# Altium PCB AWSAM5_CS704.PcbDoc
Units mm, origin at the board's own origin, x right, y up, seen from the top; angles counter-clockwise.
Board outline 46 x 71 mm, 2 copper layers (Top Layer, Bottom Layer); 51 components, 51 nets, 234 pads, 129 vias.
Unrouted connection lines stored in the file: 3.
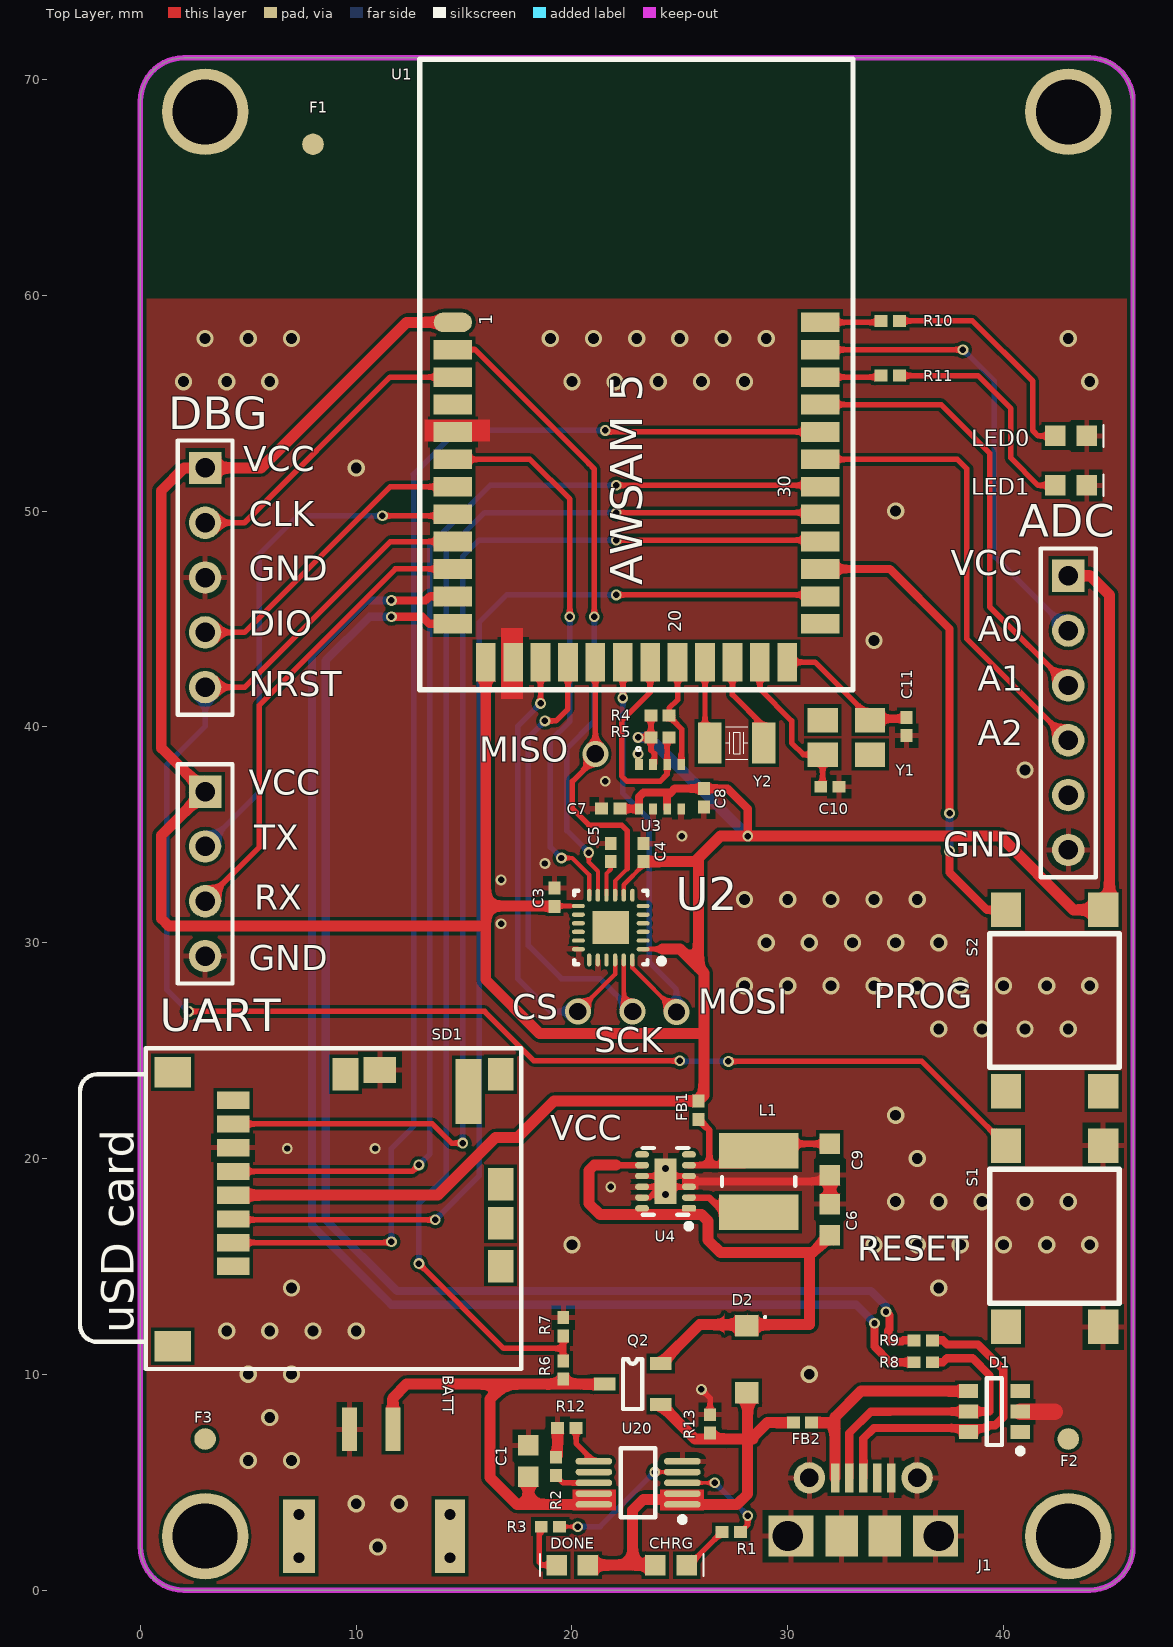
[diagram p0: Top Layer view]
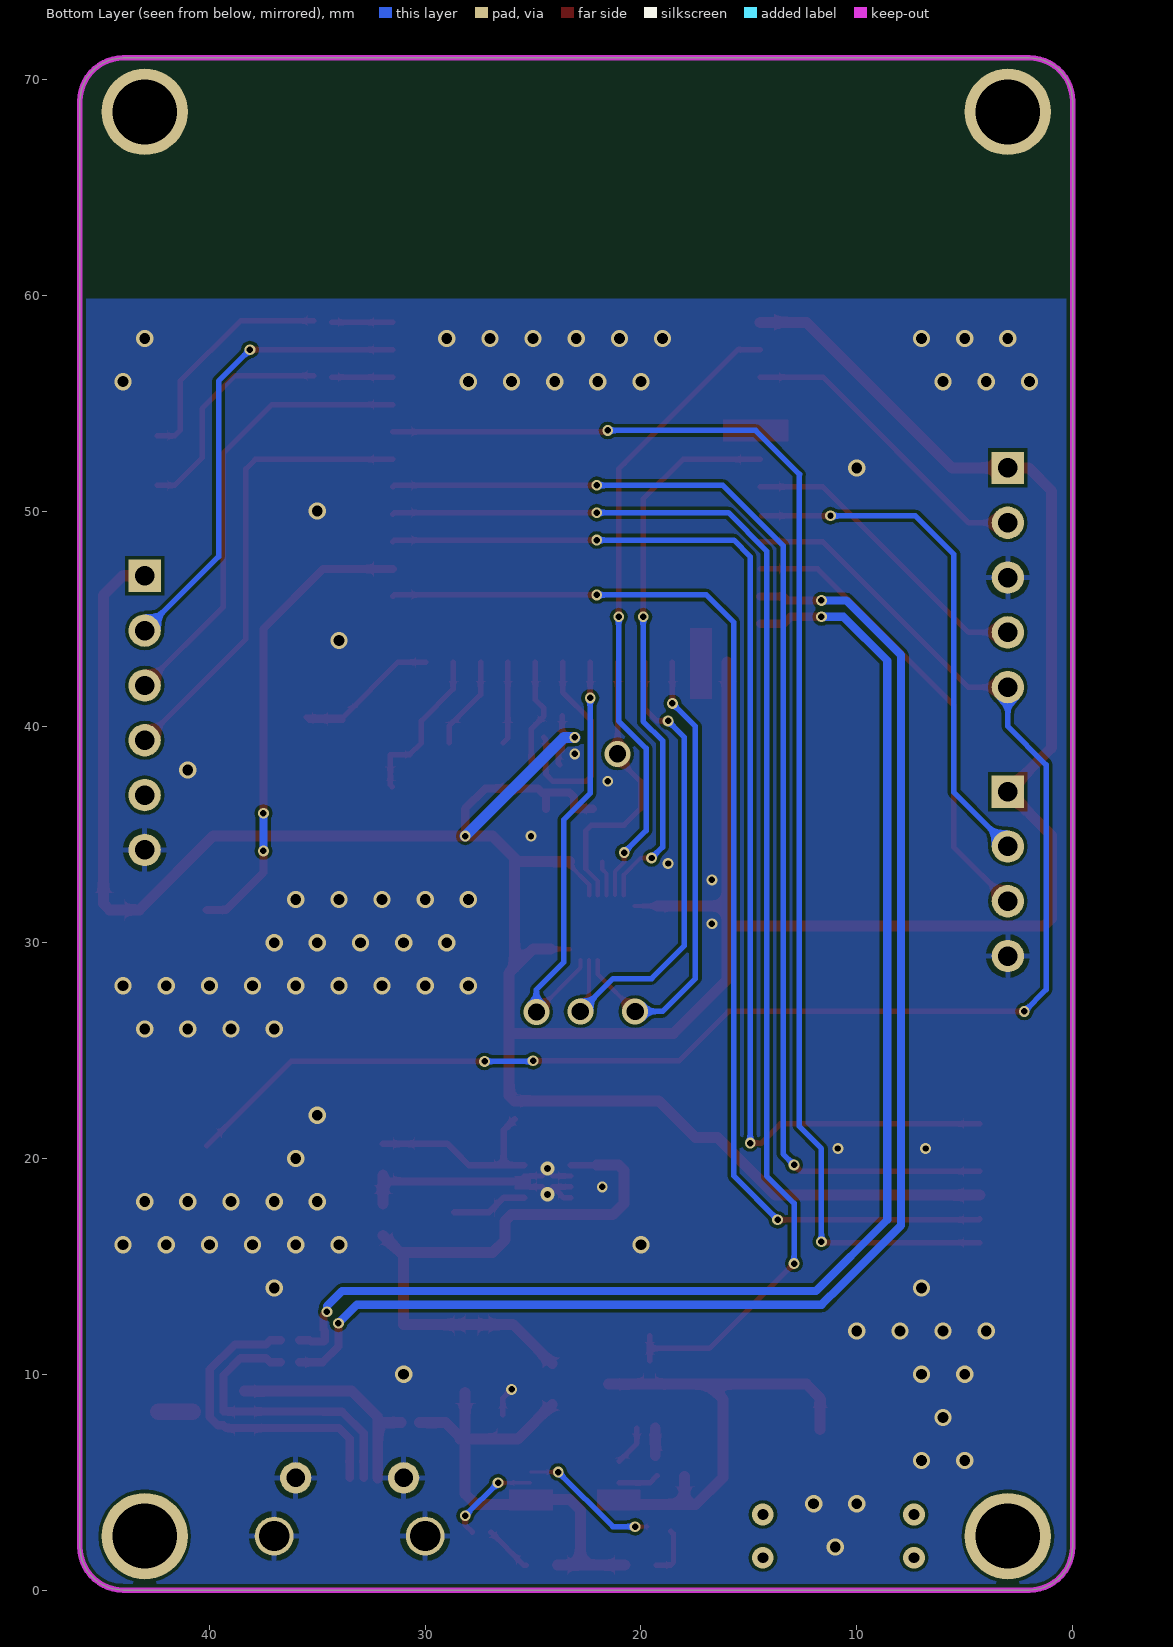
[diagram p1: Bottom Layer view, seen from below]

## Layer stack, top to bottom
Top Solder: solder mask 0.0102, Solder Resist, Dk 3.5
Top Layer: signal copper 0.0356
Dielectric 1: dielectric 0.32, FR-4, Dk 4.8
Bottom Layer: signal copper 0.0356
Bottom Solder: solder mask 0.0102, Solder Resist, Dk 3.5

## Board outline
0,2 0,69 cw(c2,69) 2,71 44,71 cw(c44,69) 46,69 46,2 cw(c44,2) 44,0 2,0 cw(c2,2)

## Design rules (kind name [scope] priority, off if disabled: settings)
Clearance [All] p1: gap=0.152
DiffPairsRouting [All] p1: maxlimit=0.254 minlimit=0.254 mostfreqgap=0.254 toplayer_minwidth=0.381 toplayer_maxwidth=0.381 toplayer_prefwidth=0.381 bottomlayer_minwidth=0.381 bottomlayer_maxwidth=0.381 bottomlayer_prefwidth=0.381 maxuncoupledlength=12.7
HoleSize [All] p1: absolutevalues=TRUE maxlimit=4 minlimit=0.025 maxpercent=80.000 minpercent=20.000
PolygonConnect PolygonConnect_GND [InNet('GND') vs IsVia] p1: connectstyle=Direct reliefconductorwidth=0.254 reliefentries=4 polygonreliefangle="90 Angle" airgapwidth=0.254
PolygonConnect [All] p2: connectstyle=Relief reliefconductorwidth=0.254 reliefentries=4 polygonreliefangle="90 Angle" airgapwidth=0.254
RoutingVias [All] p1: holewidth=0.3 width=0.5 viastyle="Through Hole" minholewidth=0.3 minwidth=0.5 maxholewidth=0.3 maxwidth=0.5
SilkToSolderMaskClearance [IsPad] p1: minsilkscreentomaskgap=0.152 clearancetoexposedcopper=TRUE
SolderMaskExpansion [All] p1: expansion=0.102
Width [All] p1: maxlimit=0.762 minlimit=0.152 preferedwidth=0.254
27 further rules are at their usual default settings.

## Classes and differential pairs
differential pair USB_D: +USB_D_P -USB_D_N
differential pair USB: +USB_P -USB_N

## Components (designator, comment, footprint, x,y, rotation, side; value= is the part's Value field where it differs from the comment)
ADC "Header 6" HDR1X6 43,47 r270 top
BATT "JST-PH-2" JST-PH-2POS 10.7,6.4 r180 top
C1 "CAP" CAP0603 17.986,5.984 r270 top
C3 "CAP" CAP0402 19.2,32.1 r270 top
C4 "CAP" CAP0402 23.32,34.178 r270 top
C5 "CAP" CAP0402 21.796,34.178 r270 top
C6 "CAP" CAP0603 31.956,17.16 r270 top
C7 "CAP" CAP0402 21.796,36.21 r0 top
C8 "CAP" CAP0402 26.114,36.718 r90 top
C9 "CAP" CAP0603 31.956,19.954 r90 top
C10 "CAP" CAP0402 31.956,37.226 r180 top
C11 "CAP" CAP0402 35.512,40.02 r90 top
CHRG "LED" LED0603P 24.59,1.158 r0 top
D1 "SP0505BAHTG" SOT26A-6L 39.576,8.27 r180 top
D2 "DIODE-SCHOTTKY" SODFL350X110-2N 28.1,10.7 r270 top
DBG "" HDR1X5 3,52 r270 top locked
DONE "LED" LED0603P 20.018,1.158 r180 top
F1 "FIDUCIAL" FIDUCIAL-1MM#1 2.5,54 r0 top locked
F2 "FIDUCIAL" FIDUCIAL-1MM#2 38,7 r0 top
F3 "FIDUCIAL" FIDUCIAL-1MM#3 3,7 r0 top
FB1 "IND" IND0402 25.86,22.24 r90 top
FB2 "IND" IND0402 30.686,7.762 r180 top
J1 "1050170001" 1050170001 33.5,2.5 r0 top locked
L1 "LPS3314" "CoilCraft- LPS3314" 28.654,18.938 r90 top
LED0 "LED" LED0603P 43.132,53.482 r0 top
LED1 "LED" LED0603P 43.132,51.196 r0 top
Q2 "FET-PCH-DIODE" SOT23-3 22.812,9.54 r270 top
R1 "Resistor" SMT0402 27.384,2.682 r180 top
R2 "RES" SMT0402 19.256,5.73 r90 top
R3 "Resistor" SMT0402 19.002,2.936 r180 top
R4 "RES" SMT0402 24.082,40.528 r180 top
R5 "RES" SMT0402 24.082,39.512 r180 top
R6 "RES" SMT0402 19.6,10.2 r270 top
R7 "RES" SMT0402 19.6,12.2 r270 top
R8 "15R" SMT0402 36.274,10.556 r0 top
R9 "Resistor" SMT0402 36.274,11.572 r0 top
R10 "Resistor" SMT0402 34.75,58.816 r180 top
R11 "Resistor" SMT0402 34.75,56.276 r180 top
R12 "RES" SMT0402 19.764,7.508 r180 top
R13 "RES" RES0402 26.4,7.7 r270 top
S1 "SW-PB-RESET" "MC32882 Switch" 42.37,16.398 r270 top
S2 "SW-PB-BOOT0" "MC32882 Switch" 42.37,27.32 r270 top
SD1 "Molex 502570" "micro SD" 0.5,10.5 r90 top locked
U1 "AWSAM_5" AWSAM_5 31.5,43 r90 top locked
U2 "MPU-9250" QFN40P300X300X105_HS-25L 21.8,30.7 r180 top
U3 "BME280" BME280 24.082,37.226 r90 top
U4 "TPS62740" TPS62740_12Pin 24.336,18.938 r180 top
U20 "MCP73833-FCI/UN" MSOP-UN10_N 23.066,4.968 r180 top
UART "Header 4" HDR1X4 3,37 r270 top locked
Y1 "TSX-3225" AP7-00061 32.718,39.512 r90 top
Y2 "CM315-32.768KEZF-UT" "SMD Crystal 32kHz" 27.638,39.258 r0 top

## Footprints (in the part's own frame and the unit in brackets; to place one, negate y for a bottom-side part, rotate by r counter-clockwise, add the part's x,y. Pads: shape width x height; smd on the part's side, far side on the other; paste and mask are expansions set on the pad)
1050170001 [mm] "CONN USB MICRO MOLEX MODIFIED FOR DRILL HITS"
  round 1.8 hole 1.4: 0(-3.5,0) 0(3.5,0)
  rect 2.1x1.9 smd: 0(-3.35,0) 0(3.35,0)
  round 1.45 hole 0.85: 0(-2.5,2.7) 0(2.5,2.7)
  rect 1.5x1.9 smd: 0(-1,0) 0(1,0)
  rect 0.4x1.35 smd: 1(-1.3,2.7) 2(-0.65,2.7) 3(0,2.7) 4(0.65,2.7) 5(1.3,2.7)
  body extent -4.1,-2.5 4.1,2.9, height 2.78
AP7-00061 [mm] "TSX-3225"
  rect 1.15x1.4 smd: 1(-0.8,1.1) 2(-0.8,-1.1) 3(0.8,-1.1) 4(0.8,1.1)
  body extent -1.25,-1.61 1.25,1.61, height 0.82
AWSAM_5 [mil] "Footprint for AWSAM_5"
  oval 36x70 smd: 1(620,670)
  rect 36x70 smd: 2(570,670) 3(520,670) 4(470,670) 5(420,670) 6(370,670) 7(320,670) 8(270,670) 9(220,670) 10(170,670) 11(120,670) 12(70,670) 25(70,0) 26(120,0) 27(170,0) 28(220,0) 29(270,0) 30(320,0) 31(370,0) 32(420,0) 33(470,0) 34(520,0) 35(570,0) 36(620,0)
  rect 70x36 smd: 13(0,610) 14(0,560) 15(0,510) 16(0,460) 17(0,410) 18(0,360) 19(0,310) 20(0,260) 21(0,210) 22(0,160) 23(0,110) 24(0,60)
  silkscreen extent -50,-60 1100,730, body extent 0,0 1100,685, height 170
BME280 [mm] "BOSH SENSORTECH TEMP/PRESS/HUMID SENSOR"
  rect 0.5x0.35 smd: 1(1.025,0.975) 2(1.025,0.325) 3(1.025,-0.325) 4(1.025,-0.975) 5(-1.025,-0.975) 6(-1.025,-0.325) 7(-1.025,0.325) 8(-1.025,0.975)
  silkscreen extent 1.65,0.9 1.85,1.1, body extent -1.25,-1.25 1.25,1.25, height 0.93
CAP0402 [mm] "0402 foorprint SMT"
  rect 0.6x0.55 smd: 1(-0.425,0) 2(0.425,0)
  body extent -0.5,-0.26 0.5,0.26, height 0.57
CAP0603 [mm]
  rect 0.95x0.95 smd: 1(-0.725,0) 2(0.725,0)
  body extent -0.8,-0.41 0.8,0.41, height 0.57
"CoilCraft- LPS3314" [mm]
  rect 1.65x3.7 smd: 1(-1.425,0) 2(1.425,0)
  silkscreen extent -0.2,-1.7 0.2,1.7, body extent -1.7,-1.7 1.7,1.7, height 1.3
FIDUCIAL-1MM#1 [mm] "1MM FIDUCAL MARKER"
  round 1 smd mask+0.5: 1(5.5,13)
FIDUCIAL-1MM#2 [mm] "1MM FIDUCAL MARKER"
  round 1 smd mask+0.5: 1(5,0)
FIDUCIAL-1MM#3 [mm] "1MM FIDUCAL MARKER"
  round 1 smd mask+0.5: 1(0,0)
HDR1X4 [mm] "Connector; Header; 4 Position"
  rect 1.5x1.5 hole 0.9: 1(0,0)
  round 1.5 hole 0.9: 2(2.54,0) 3(5.08,0) 4(7.62,0)
  silkscreen extent -1.27,-1.27 8.89,1.27
HDR1X5 [mm] "Connector; Header; 5 Position"
  rect 1.5x1.5 hole 0.9: 1(0,0)
  round 1.5 hole 0.9: 2(2.54,0) 3(5.08,0) 4(7.62,0) 5(10.16,0)
  silkscreen extent -1.27,-1.27 11.43,1.27
HDR1X6 [mm] "Connector; Header; 6 Position"
  rect 1.5x1.5 hole 0.9: 1(0,0)
  round 1.5 hole 0.9: 2(2.54,0) 3(5.08,0) 4(7.62,0) 5(10.16,0) 6(12.7,0)
  silkscreen extent -1.27,-1.27 13.97,1.27
IND0402 [mm] "0402 foorprint SMT"
  rect 0.6x0.55 smd: 1(-0.425,0) 2(0.425,0)
  body extent -0.5,-0.25 0.5,0.25, height 0.5
JST-PH-2POS [mm] "JST-PH 2POS SM R/A 2.0mm"
  rect 1.4x3.4 smd: 0(-3.65,3.9)
  rect 1.5x3.4 smd: 0(3.35,3.9)
  rect 0.7x2 smd: 1(1,-1.05) 2(-1,-1.05)
LED0603P [mm]
  rect 0.95x0.95 smd: 1(-0.725,0) 2(0.725,0)
  silkscreen extent 1.5,-0.5 1.5,0.5, body extent -0.8,-0.4 0.81,0.4, height 0.72
"MC32882 Switch" [mm] "MULTICOMP  MC32882  SWITCH, TACTILE, 50MA, 12VDC, SMD"
  rect 1.6x1.4 smd: 1(-4.2,-2.25) 1(4.2,-2.25) 2(-4.2,2.25) 2(4.2,2.25)
  silkscreen extent -3.1,-3 3.1,3
"micro SD" [mm] "Molex 502570 - http://www.molex.com/pdm_docs/sd/5025700893_sd.pdf"
  rect 0.8x1.5 smd: 1(4.5,-3.8) 2(5.6,-3.8) 3(6.7,-3.8) 4(7.8,-3.8) 5(8.9,-3.8) 6(10,-3.8) 7(11.1,-3.8) 8(12.2,-3.8)
  rect 1.2x1.5 smd: 9(13.6,-10.6)
  rect 1.5x1.2 smd: 10(6.5,-16.2) 13(4.5,-16.2) 14(13.4,-16.2) 15(8.3,-16.2) 17(13.4,-9)
  rect 1.4x1.7 smd: 11(0.8,-1) 12(13.5,-1)
  rect 3x1.2 smd: 16(12.6,-14.7)
  silkscreen extent -0.25,-17.14 14.6,3.3
MSOP-UN10_N [mm] "TSSOP, 10-Leads, Body 3x3mm, Pitch 0.5mm, IPC Medium Density"
  oval 1.7x0.3 smd: 1(-2.05,1) 2(-2.05,0.5) 3(-2.05,0) 4(-2.05,-0.5) 5(-2.05,-1) 6(2.05,-1) 7(2.05,-0.5) 8(2.05,0) 9(2.05,0.5) 10(2.05,1)
  silkscreen extent -2.17,-1.6 0.8,1.82, body extent -1.6,-1.6 1.6,1.6, height 1.1
QFN40P300X300X105_HS-25L [mm] "QFN, 24-Leads, Body 3.00x3.00mm, Pitch 0.40mm, Thermal Pad 1.70x1.54mm, IPC High Density"
  oval 0.6x0.2 smd: 1(-1.5,1) 2(-1.5,0.6) 3(-1.5,0.2) 4(-1.5,-0.2) 5(-1.5,-0.6) 6(-1.5,-1) 13(1.5,-1) 14(1.5,-0.6) 15(1.5,-0.2) 16(1.5,0.2) 17(1.5,0.6) 18(1.5,1)
  oval 0.2x0.6 smd: 7(-1,-1.5) 8(-0.6,-1.5) 9(-0.2,-1.5) 10(0.2,-1.5) 11(0.6,-1.5) 12(1,-1.5) 19(1,1.5) 20(0.6,1.5) 21(0.2,1.5) 22(-0.2,1.5) 23(-0.6,1.5) 24(-1,1.5)
  rect 1.7x1.54 smd: 25(0,0)
  silkscreen extent -2.48,-1.7 1.7,1.7, body extent -1.55,-1.55 1.55,1.55, height 1.05
RES0402 [mm] "0402 foorprint SMT"
  rect 0.6x0.55 smd: 1(-0.425,0) 2(0.425,0)
  body extent -0.5,-0.25 0.5,0.25, height 0.3
"SMD Crystal 32kHz" [mm]
  rect 1.1x1.9 smd mask+0.1: 1(-1.25,0) 2(1.25,0)
  silkscreen extent -0.5,-0.75 0.5,0.75, body extent -1.6,-0.75 1.6,0.75, height 0.9
SMT0402 [mm] "0402 foorprint SMT"
  rect 0.6x0.55 smd: 1(-0.425,0) 2(0.425,0)
  body extent -0.59,-0.25 0.59,0.25, height 2.65
SODFL350X110-2N [mm] "SODFL, 2-Leads, Body 1.70x3.50mm, IPC Medium Density"
  rect 1x1.1 smd: 1(-1.55,0) 2(1.55,0)
  silkscreen extent -2,0.8 -1.9,0.9, body extent -1.75,-0.95 1.75,0.95, height 1.1
SOT23-3 [mm] "SOT23-3"
  round 0.2 on Top Overlay: 1(-1.5,-0.55)
  rect 0.6x1 smd: 1(0.95,1.3) 2(-0.95,1.3) 3(0,-1.3)
  silkscreen extent -1.15,-0.45 1.15,0.45, body extent -1.45,-1.4 1.45,1.4, height 1.3
SOT26A-6L [mm] "SOT23, 6-Leads, Body 2.9x1.7mm, Pitch 0.95mm, Lead Span 2.8mm, IPC High Density"
  rect 0.9x0.65 smd: 1(-1.2,0.95) 2(-1.2,0) 3(-1.2,-0.95) 4(1.2,-0.95) 5(1.2,0) 6(1.2,0.95)
  silkscreen extent -1.33,-1.55 0.35,1.95, body extent -0.9,-1.55 0.9,1.55, height 1.45
TPS62740_12Pin [mm]
  rrect50% 0.65x0.3 smd: 1(-1.085,1.25)
  oval 0.65x0.3 smd: 2(-1.085,0.75) 3(-1.085,0.25) 4(-1.085,-0.25) 5(-1.085,-0.75) 6(-1.085,-1.25) 7(1.085,-1.25) 8(1.085,-0.75) 9(1.085,-0.25) 10(1.085,0.25) 11(1.085,0.75) 12(1.085,1.25)
  rect 1x2.1 smd: 13(0,0)
  silkscreen extent -1.2,-1.55 1.05,2.2, body extent -1.05,-1.55 1.05,1.55, height 0.8

## Part data
ADC: "Header, 6-Pin"
BATT: library part S2B-PH-SM4-TB, "CONN SM JST PH 2-POS"
C1 C6 C9: library part CAP-SM-0603-X5R-10uF, "CAP SM 0603 X5R 10uF"
C3 C5 C7 C8: library part CAP-SM-0402-X7R-100NF, "CAP SM 0402 X7R 100NF"
C4: library part CAP-SM-0402-X7R-10NF, "CAP SM 0402 X7R 10NF"
C10 C11: library part CAP-SM-0402-NP0-10PF, "CAP SM 0402 NP0 10PF"
CHRG DONE LED0 LED1: library part LED-0603-RED, "LED 0603 RED"
D1: "IC DIODE TRANS VOLT SUPPR 5 PACKAGE"
D2: library part PMEG3020BER, "DIODE  SCHOTTKY 1A 40V"
DBG: library part "Header 5", "Header, 5-Pin"
F1 F2 F3: library part FIDUCIAL-1MM, "FIDUCIAL 1MM CENTER"
FB1 FB2: library part BLM15AX102SN1D, "FERRITE BEAD 350mA 0402"
J1: "CONN RCPT MICRO USB R/A SMD"
L1: library part Inductor, "Inductor"
Q2: library part FDN338P, "MOSFET P-CH 20V 115MA SOT23-3"
R1 R3 R10 R11: library part RES-SM-0603-220R, "RES SM 0603 220R"
R2 R4 R5: library part RES-SM-0402-10K, "RES SM 0402 10K"
R6 R7 R13: library part RES-SM-0402-100K, "RES SM 0402 100K"
R8 R9: library part RES-SM-0603-22K, "RES SM 0603 22K"
R12: library part RES-SM-0402-1K, "RES SM 0402 1K"
S1 S2: library part SW-PB, "Switch"
SD1: library part MOLEX-502570, "CONN SM MICROSD"
U2: "IC 9DOF IMU"
U3: "IC SENSOR PRESS/HUMID/TEMP"
U4: "IC REG BUCK"
U20: "Stand-Alone Linear Li-Ion/Li-Polymer Charge Management Controller with Power-Good Output, 4.2V, 10-Pin MSOP, Industrial Temperature"
UART: "Header, 4-Pin"
Y1: library part A07-0078, "16MHz uXtal, 3.2 x 2.5 mm SMD, CL=9pF, 15PPM, ESR=80ohm(Max."
Y2: "CRYSTAL 32.768KHZ 12.5PF SMD"

## Free pads (board coordinates)
  round 4 hole 3: 0(3,2.5) 0(43,2.5) 0(43,68.5)
  round 4 hole 3 unplated: 0(3,68.5)

## Via types
v1: diameter 0.8, hole 0.5, Top Layer to Bottom Layer, tented both sides, 75 vias
v2: diameter 0.5, hole 0.3, Top Layer to Bottom Layer, tented both sides, 44 vias
v3: diameter 1, hole 0.5, Top Layer to Bottom Layer, tented both sides, 4 vias
v4: diameter 1.2, hole 0.8, Top Layer to Bottom Layer, 4 vias
v5: diameter 0.66, hole 0.33, Top Layer to Bottom Layer, tented both sides, 2 vias

## Nets (pads, with @x,y where several pads share a name; then routed paths per layer and width w, separated by ;. In a path a pad name is that pad's centre, name@x,y a point inside that pad or via, vN(x,y) a via of type N, cw(c..) or ccw(c..) an arc to the next point about the centre after c; other vN are vias at no path point)
ADC0: ADC.2 U1.35 | length 21.6
  Top Layer w0.254: U1.35 v2(38.12,57.478)
  Bottom Layer w0.254: v2(38.12,57.478) 39.576,56.022 39.576,47.894 ADC.2@43,44.47
ADC1: ADC.3 U1.33 | length 21.1
  Top Layer w0.254: U1.33 37.104,54.938 39.353,52.689 39.353,45.567 ADC.3
ADC2: ADC.4 U1.31 | length 21.5
  Top Layer w0.254: U1.31 37.866,52.398 38.306,51.958 38.306,44.074 ADC.4
ADC3: R6.1 R7.2 U1.29 | length 61.1
  Top Layer w0.254: v2(12.906,15.128) 16.834,11.2 19.6,11.2 ; R6.1 19.6,11.2 ; R7.2 19.6,11.2 ; v2(22.05,49.926) 31.432,49.926 U1.29
  Bottom Layer w0.254: v2(12.906,15.128) 12.906,17.922 14.176,19.192 14.176,48.148 15.954,49.926 v2(22.05,49.926)
BOOT0: S2.1 U1.27 | length 21.8
  Top Layer w0.381: U1.27 34.73,47.318 37.5,44.548 v2(37.5,36) ; v2(37.5,34.25) 37.5,33.25 39.23,31.52 S2.1@40.12,31.52
  Bottom Layer w0.381: v2(37.5,34.25) v2(37.5,36)
CHRG: U1.4
GND: ADC.6 BATT.1 C1.1 C3.1 C4.1 C5.1 C6.1 C7.1 C8.1 C9.1 C10.1 C11.1 D1.2 DBG.3 J1.0 J1.5 LED0.2 LED1.2 R2.2 R7.1 R12.2 R13.1 S1.2 SD1.6 SD1.9 U1.5 U1.14 U2.18 U2.20 U3.1 U3.5 U3.7 U4.3 U4.4 U4.9 U4.10 U4.11 U4.13 U20.5 UART.4 | length 16.5
  Top Layer w0.254: R2.2 R2.2@19.339,6.238 ; U4.11 23.586,18.188 24.086,18.688 U4.10 ; U4.9 U4.13@24.086,19.188 ; U4.13@24.586,18.688 U4.3 ; U4.13@24.586,19.188 U4.4 ; v2(26,9.3) 26.4,8.9 R13.1 ; C9.1@31.665,18.938 C9.1
  Top Layer w0.381: 25.671,18.938 C9.1@31.665,18.938
  Top Layer w0.508: R2.2@19.339,6.238 R12.2 ; C6.1 C9.1
  Top Layer w0.762: D1.2 42.37,8.27
  other v1: 11,2 10,4 12,4 5,6 7,6 6,8 5,10 7,10 31,10 4,12 6,12 8,12 10,12 7,14 37,14 20,16 34,16 36,16 38,16 40,16 42,16 44,16 35,18 37,18 39,18 41,18 43,18 36,20 35,22 37,26 39,26 41,26 43,26 28,28 30,28 32,28 34,28 36,28 38,28 40,28 42,28 44,28 29,30 31,30 33,30 35,30 37,30 28,32 30,32 32,32 34,32 36,32 41,38 34,44 35,50 10,52 2,56 4,56 6,56 20,56 22,56 24,56 26,56 28,56 44,56 3,58 5,58 7,58 19,58 21,58 23,58 25,58 27,58 29,58 43,58
  other v2: 21.796,18.684 6.81,20.462 10.874,20.462 16.716,30.876 16.716,32.908 18.748,33.67 25.098,34.94 21.542,37.48 23.066,38.75
  other v5: 24.336,18.338 24.336,19.538
I2C_SCL: R5.1 U1.19 U3.3 | length 9.9
  Top Layer w0.254: U1.19 23.626,41.596 22.304,40.274 22.304,37.734 22.558,37.48 24.082,37.48 24.407,37.805 U3.3 24.407,39.412 R5.1
I2C_SDA: R4.1 U1.20 U3.4 | length 5.7
  Top Layer w0.254: U1.20 24.896,41.254 24.507,40.865 R4.1 24.507,40.482 25.086,39.903 25.086,38.28 U3.4@25.061,38.255 ; 25.061,38.75 U3.4@25.061,38.255 ; U3.4@25.061,38.255 U3.4 25.061,38.251 U3.4@25.061,38.255
LED0: R10.2 U1.36 | length 2.8
  Top Layer w0.254: U1.36 R10.2@34.325,58.748
LED1: R11.2 U1.34 | length 2.8
  Top Layer w0.254: U1.34 R11.2@34.325,56.208
MPU_INT: U1.6 U2.12 | length 25.9
  Top Layer w0.2: v2(19.51,33.924) 20.018,33.924 20.8,33.142 U2.12
  Top Layer w0.254: U1.6 18.054,52.398 19.899,50.553 v2(19.899,45.1)
  Bottom Layer w0.254: v2(19.51,33.924) 19.002,34.432 19.002,39.36 19.899,40.257 v2(19.899,45.1)
MPU_SYNC: U1.2 U2.11 | length 29.7
  Top Layer w0.2: v2(20.78,34.178) 20.78,33.737 21.206,33.31 U2.11@21.206,32.206
  Top Layer w0.254: U1.2 15.514,57.478 20.784,52.208 20.78,52.204 21.034,51.95 v2(21.034,45.1)
  Bottom Layer w0.254: v2(20.78,34.178) 19.764,35.194 19.764,39.004 21.034,40.274 v2(21.034,45.1)
NetC5_2: C5.2 U2.10 | length 1.6
  Top Layer w0.2: U2.10 21.6,33.204 21.796,33.4 C5.2
NetC9_2: C9.2 FB1.1 L1.2 U4.5 | length 9.3
  Top Layer w0.305: U4.5 26.368,19.688 ; FB1.1 26.368,21.307 26.368,19.688 ; C9.2 28.97,20.679 L1.2 27.979,19.688 26.368,19.688
NetC10_2: C10.2 U1.23 Y1.1 | length 7.5
  Top Layer w0.254: U1.23 28.706,41.746 30.178,40.274 30.178,39.258 30.724,38.712 Y1.1 31.618,37.313 C10.2
NetC11_2: C11.2 U1.24 Y1.3 | length 8.3
  Top Layer w0.254: U1.24 31.262,43 33.817,40.445 C11.2 35.379,40.312 Y1.3
NetCHRG_2: CHRG.2 R1.2 | length 2.3
  Top Layer w0.254: CHRG.2 25.435,1.158 R1.2
NetD1_4: D1.4 FB2.1 J1.1 | length 10.7
  Top Layer w0.508: FB2.1 31.946,7.762 32.2,7.508 ; J1.1 32.2,7.508 ; D1.4 33.404,9.22 32.2,8.016 32.2,7.508
NetDONE_2: DONE.2 R3.2 | length 2.3
  Top Layer w0.254: R3.2@18.613,2.718 18.494,2.599 18.494,1.284 18.62,1.158 DONE.2
NetL1_1: L1.1 U4.2 | length 3.5
  Top Layer w0.305: U4.2 26.356,18.188 27.031,17.513 L1.1
NetLED0_1: LED0.1 R10.1 | length 10.8
  Top Layer w0.254: R10.1 38.56,58.816 41.354,56.022 41.354,53.736 41.608,53.482 LED0.1
NetLED1_1: LED1.1 R11.1 | length 10.7
  Top Layer w0.254: R11.1 38.814,56.276 40.338,54.752 40.338,52.466 41.608,51.196 LED1.1
NetR1_1: R1.1 U20.3 | length 4.6
  Top Layer w0.152: U20.3 v2(26.622,4.968)
  Top Layer w0.254: R1.1 28.146,3.019 v2(28.146,3.444)
  Bottom Layer w0.254: v2(26.622,4.968) v2(28.146,3.444)
NetR2_1: R2.1 U20.8 | length 1.9
  Top Layer w0.254: R2.1 19.593,4.968 U20.8
NetR3_1: R3.1 U20.4 | length 6.5
  Top Layer w0.152: R3.1@19.681,2.936 v2(20.272,2.936) ; v2(23.836,5.468) U20.4
  Bottom Layer w0.254: v2(20.272,2.936) 21.304,2.936 v2(23.836,5.468)
NetR12_1: R12.1 U20.6 | length 1.9
  Top Layer w0.254: R12.1 20.189,6.795 U20.6
NetU1_21: U1.21 Y2.1 | length 3.8
  Top Layer w0.254: U1.21 26.166,39.48 Y2.1
NetU1_22: U1.22 Y2.2 | length 4.3
  Top Layer w0.254: U1.22 27.436,41.492 28.888,40.04 Y2.2
NRST: DBG.5 S1.1 U1.9 | length 70.9
  Top Layer w0.254: v2(2.238,26.812) 15.954,26.812 18.24,24.526 v2(25,24.526) ; DBG.5 4.84,41.84 11.588,48.588 U1.9 ; v2(27.25,24.5) 36.218,24.5 S1.1@40.12,20.598
  Bottom Layer w0.254: v2(2.238,26.812) 1.222,27.828 1.222,38.242 3,40.02 DBG.5 ; v2(25,24.526) 25.026,24.5 v2(27.25,24.5)
RX: U1.10 UART.3 | length 21.7
  Top Layer w0.254: UART.3 5.5,34.42 5.5,41 11.818,47.318 U1.10
SPI0_CS: U1.15 U2.22 | length 21.6
  Top Layer w0.2: v4(20.272,26.812) 22,28.54 U2.22
  Top Layer w0.254: v2(18.546,41.088) U1.15
  Bottom Layer w0.254: v2(18.546,41.088) 17.478,40.02 17.478,28.336 19.002,26.812 v4(20.272,26.812)
SPI0_MISO: U1.17 U2.9 | length 13.4
  Top Layer w0.2: U2.9 22,32.858 22.558,33.416
  Top Layer w0.254: U1.17 v4(21.086,38.75) 21.086,38.548 20.018,37.48 20.018,36.21 20.78,35.448 22.304,35.448 22.558,35.194 22.558,33.416
SPI0_MOSI: U1.18 U2.24 | length 20.7
  Top Layer w0.2: U2.24 22.8,28.837 v4(24.844,26.793)
  Top Layer w0.254: v2(22.356,41.342) U1.18 ; v4(24.844,26.793) v4@24.844,27.028
  Bottom Layer w0.254: v2(22.356,41.342) 22.356,36.92 23.574,35.702 23.574,29.098 24.844,27.828 v4(24.844,26.793)
SPI0_SCK: U1.16 U2.23 | length 22.8
  Top Layer w0.2: U2.23@22.406,29.2 22.406,27.218 v4(22.812,26.812)
  Top Layer w0.254: v2(18.748,40.274) 19.256,40.274 19.816,40.834 U1.16
  Bottom Layer w0.254: v2(18.748,40.274) 17.986,39.512 17.986,29.86 19.51,28.336 21.288,28.336 v4@22.8,26.824
SPI2_CS: SD1.2 U1.32 | length 63.1
  Top Layer w0.254: SD1.2 11.592,16.1 v2(11.636,16.144) ; v2(21.542,53.736) 21.61,53.668 U1.32
  Bottom Layer w0.254: v2(11.636,16.144) 11.636,20.462 12.673,21.499 12.673,51.675 12.648,51.7 14.684,53.736 v2(21.542,53.736)
SPI2_MISO: SD1.7 U1.28 | length 55.1
  Top Layer w0.254: SD1.7 13.536,21.6 14.42,20.716 v2(14.938,20.716) ; v2(22.05,48.656) 31.432,48.656 U1.28
  Bottom Layer w0.254: v2(14.938,20.716) 14.938,47.894 15.7,48.656 v2(22.05,48.656)
SPI2_MOSI: SD1.3 U1.26 | length 54.3
  Top Layer w0.254: SD1.3 4.34,17.16 v2(13.668,17.16) ; v2(22.05,46.116) 31.432,46.116 U1.26
  Bottom Layer w0.254: v2(13.668,17.16) 15.7,19.192 15.7,44.846 16.97,46.116 v2(22.05,46.116)
SPI2_SCK: SD1.5 U1.30 | length 56.9
  Top Layer w0.254: SD1.5 12.606,19.4 v2(12.906,19.7) ; v2(22.05,51.196) 31.432,51.196 U1.30
  Bottom Layer w0.254: v2(12.906,19.7) 13.414,20.208 13.414,48.402 16.208,51.196 v2(22.05,51.196)
SW1: SD1.10
SWCLK: DBG.2 U1.3 | length 14.3
  Top Layer w0.254: DBG.2 4.82,49.46 11.568,56.208 U1.3
SWDIO: DBG.4 U1.7 | length 14.3
  Top Layer w0.254: DBG.4 4.82,44.38 11.568,51.128 U1.7
TX: U1.8 UART.2 | length 24.2
  Top Layer w0.254: v2(11.218,49.782) U1.8@14.406,49.782
  Bottom Layer w0.254: UART.2 5.5,36.96 5.5,48 7.282,49.782 v2(11.218,49.782)
USB_D_N: R8.1 U1.11 | length 65.3
  Top Layer w0.381: v2(11.636,45.862) 13.201,45.862 13.209,45.854 13.402,46.048 U1.11 ; v2(34.02,12.366) 34.02,11.286 34.75,10.556 R8.1
  Bottom Layer w0.381: v2(11.636,45.862) 10.484,45.862 8.139,43.517 7.953,43.331 7.953,16.897 8.139,16.711 10.738,14.112 11.627,13.223 33.164,13.223 v2(34.02,12.366)
USB_D_P: R9.1 U1.12 | length 63.3
  Top Layer w0.381: v2(11.636,45.1) 13.08,45.1 13.402,44.778 U1.12 ; v2(34.554,12.9) 34.715,12.738 34.715,12.079 34.655,12.019 34.655,11.549 34.691,11.513 35.3,11.513 35.358,11.572 R9.1
  Bottom Layer w0.381: v2(11.636,45.1) 10.62,45.1 8.588,43.068 8.588,17.16 11.89,13.858 33.862,13.858 34.552,13.168 v2(34.554,12.9) v2(34.554,12.9)
USB_N: D1.5 J1.2 R8.2 | length 13.7
  Top Layer w0.381: J1.2 32.85,7.268 33.844,8.262 34.75,8.262 ; 34.75,8.27 D1.5 39.348,8.27 39.348,9.95 39.352,9.954 38.56,10.747 37.38,10.747 37.189,10.556 R8.2
USB_P: D1.6 J1.3 R9.2 | length 14.8
  Top Layer w0.381: J1.3 33.5,7.02 33.988,7.508 39.221,7.508 39.348,7.635 39.611,7.635 39.983,8.007 39.983,9.687 39.987,9.691 39.987,10.217 38.823,11.382 37.38,11.382 37.189,11.572 R9.2
VBATT: BATT.2 C1.2 Q2.3 R6.2 U20.9 U20.10 | length 22.8
  Top Layer w0.508: BATT.2 11.7,8.9 12.34,9.54 16.9,9.54 ; C1.2 17.986,3.968 ; U20.10 17.986,3.968 ; Q2.3 16.9,9.54 ; 16.9,9.54 16.208,8.848 16.208,5.222 17.462,3.968 17.986,3.968
VCC: ADC.1 C3.2 C4.2 C7.2 C8.2 DBG.1 FB1.2 R4.2 R5.2 S2.2 SD1.4 U1.1 U1.13 U2.1 U2.8 U2.13 U3.2 U3.6 U3.8 UART.1 | length 182.4
  Top Layer w0.2: C3.2@19.225,31.7 U2.13 ; U2.8 22.4,32.683 C4.2@23.32,33.603 ; U2.1 24.2,29.7
  Top Layer w0.254: v2(23.066,39.512) R5.2 ; C4.2@23.32,33.603 C4.2 ; R4.2 R5.2 ; U3.2 23.828,38.322 23.828,38.75 23.657,38.921 R5.2
  Top Layer w0.381: C7.2 23.098,36.21 U3.8 23.107,36.759 23.314,36.966 24.584,36.966 ; U3.6 24.407,36.789 24.584,36.966 ; v2(28.146,34.94) 28.146,36.21 27.213,37.143 C8.2 24.761,37.143 24.584,36.966
  Top Layer w0.508: SD1.4 13.792,18.3 16.462,20.97 17.478,20.97 19.173,22.665 FB1.2 26.114,22.919 26.114,28.59 25.86,28.844 ; U1.1 12.33,58.748 5.582,52 DBG.1 2.026,52 0.968,50.942 0.968,39.032 UART.1 0.968,34.968 0.968,31.13 1.334,30.764 15.864,30.764 16.006,30.622 ; U1.13 16.006,31.7 ; C3.2@19.225,31.7 16.006,31.7 ; C4.2 25.689,33.753 25.86,33.924 ; 24.2,29.7 25.004,29.7 25.86,28.844 ; 25.86,25.796 25.851,25.787 18.503,25.787 16.006,28.284 16.006,30.622 ; ADC.1 44.026,47 44.91,46.116 44.91,31.81 44.62,31.52 43.25,31.52 39.83,34.94 v2(28.146,34.94) 26.876,34.94 25.86,33.924 ; 16.006,30.622 16.006,31.7 ; 25.86,28.844 25.86,33.924
  Bottom Layer w0.508: v2(23.066,39.512) 23.574,39.512 v2(28.146,34.94)
VIN: C6.2 D2.1 Q2.2 U4.1 U4.8 U4.12 | length 27.9
  Top Layer w0.305: 22.05,19.7 22.062,19.688 U4.8
  Top Layer w0.508: 22.05,19.7 21.034,19.7 20.78,19.446 20.78,17.92 21.3,17.4 26,17.4 26.3,17.1 26.3,16.212 26.876,15.636 31.157,15.636 C6.2 ; Q2.2 25.922,12.3 31.016,12.3 31.016,15.495
VUSB: CHRG.1 D2.2 DONE.1 FB2.2 Q2.1@24.112,8.59 R13.2 U20.1 U20.2 | length 23.3
  Top Layer w0.508: DONE.1 22.812,1.158 ; CHRG.1 22.812,1.158 ; Q2.1@24.112,8.59 25.702,7 28.146,7 ; 24.844,4.206 23.32,4.206 22.812,3.698 22.812,1.158 ; U20.1 27.654,3.968 28.146,4.46 28.146,6.846 ; D2.2@28.146,9.15 28.146,7 ; 28.4,7 28.3,7 ; FB2.2 29.062,7.762 28.3,7 ; 28.146,6.846 28.146,7 ; 28.146,6.846 28.3,7 ; 28.146,7 28.3,7
pads on no net: ADC.5 BATT.0 D1.1 D1.3 F1.1 F2.1 F3.1 J1.4 Q2.1@22.262,11.04 SD1.1 SD1.8 SD1.11 SD1.12 SD1.13 SD1.14 SD1.15 SD1.16 SD1.17 U1.25 U2.2 U2.3 U2.4 U2.5 U2.6 U2.7 U2.14 U2.15 U2.16 U2.17 U2.19 U2.21 U2.25 U4.6 U4.7 U20.7 Y1.2 Y1.4
copper on no net:
  other v3: 7.35,1.5 14.35,1.5 7.35,3.5 14.35,3.5

## Polygon pours and split planes (outlines as drawn)
GND on Top Layer "Top Layer-No Net" (solid, pour order 4): 0,59.832 46,59.832 46,0 0,0 0,59.832
GND on Bottom Layer "BG" (solid, pour order 6): 0,59.832 46,59.832 46,0 0,0 0,59.832

## Keep-outs
Keep-Out Layer:
  the board outline again, w0.254

## Other copper
Top Layer:
  rectangle net GND: 13.16,53.228 16.208,54.244
  rectangle net GND: 16.716,41.29 17.732,44.592
  region net GND: 25.86,19.192 25.098,19.192 25.098,18.557 25.86,18.557
  rectangle net VUSB: 24.082,3.698 26.114,4.663
  rectangle net VBATT: 20.018,3.698 22.05,4.663

## Silkscreen, mask and mechanical layers (free items; w line width, h text height)
Top Overlay:
  text "VCC" at 4.778,51.45 h2
  text "CLK" at 5.032,48.91 h2
  text "VCC" at 37.544,46.624 h2
  text "GND" at 5.032,46.37 h2
  text "DIO" at 5.032,43.83 h2
  text "A0" at 38.814,43.576 h2
  text "A1" at 38.814,41.29 h2
  text "NRST" at 5.032,41.036 h2
  text "A2" at 38.814,38.75 h2
  text "MISO" at 15.7,37.988 h2
  text "VCC" at 5.032,36.464 h2
  text "TX" at 5.286,33.924 h2
  text "GND" at 37.2,33.6 h2
  text "RX" at 5.286,31.13 h2
  text "GND" at 5.032,28.336 h2
  text "PROG" at 33.988,26.558 h2
  text "MOSI" at 25.86,26.304 h2
  text "CS" at 17.224,26.05 h2
  text "SCK" at 21.034,24.526 h2
  text "VCC" at 19.002,20.462 h2
  text "RESET" at 33.226,14.874 h2

## Text inside footprints (layer, text, board x,y; h text height)
SD1: Top Overlay "uSD card" at -0.3,11.9 h1.5 r90
U1: Top Overlay "30" at 30.357,50.62 h1.02 r90; Top Overlay "20" at 25.277,44.397 h1.02 r90; Top Overlay "1" at 16.514,58.621 h1.02 r90; Top Overlay "AWSAM 5" at 23.753,46.556 h2.54 r90; Mechanical 1 "NO Copper Zone" at 31.373,65.86 h2.54 r180
U2: Mechanical 13 "Z" at 22.475,31.45 h0.4 r180; Mechanical 13 "x" at 21.125,30.85 h0.4 r180; Mechanical 13 "Y" at 21.925,30 h0.4 r180